# Altium PCB 总线驱动板-V1.0.PcbDoc
Units mil, origin at the board's own origin, x right, y up, seen from the top; angles counter-clockwise.
Board outline 1968.5 x 1181.1 mil, 2 copper layers (Top Layer, Bottom Layer); 27 components, 22 nets, 133 pads, 42 vias.
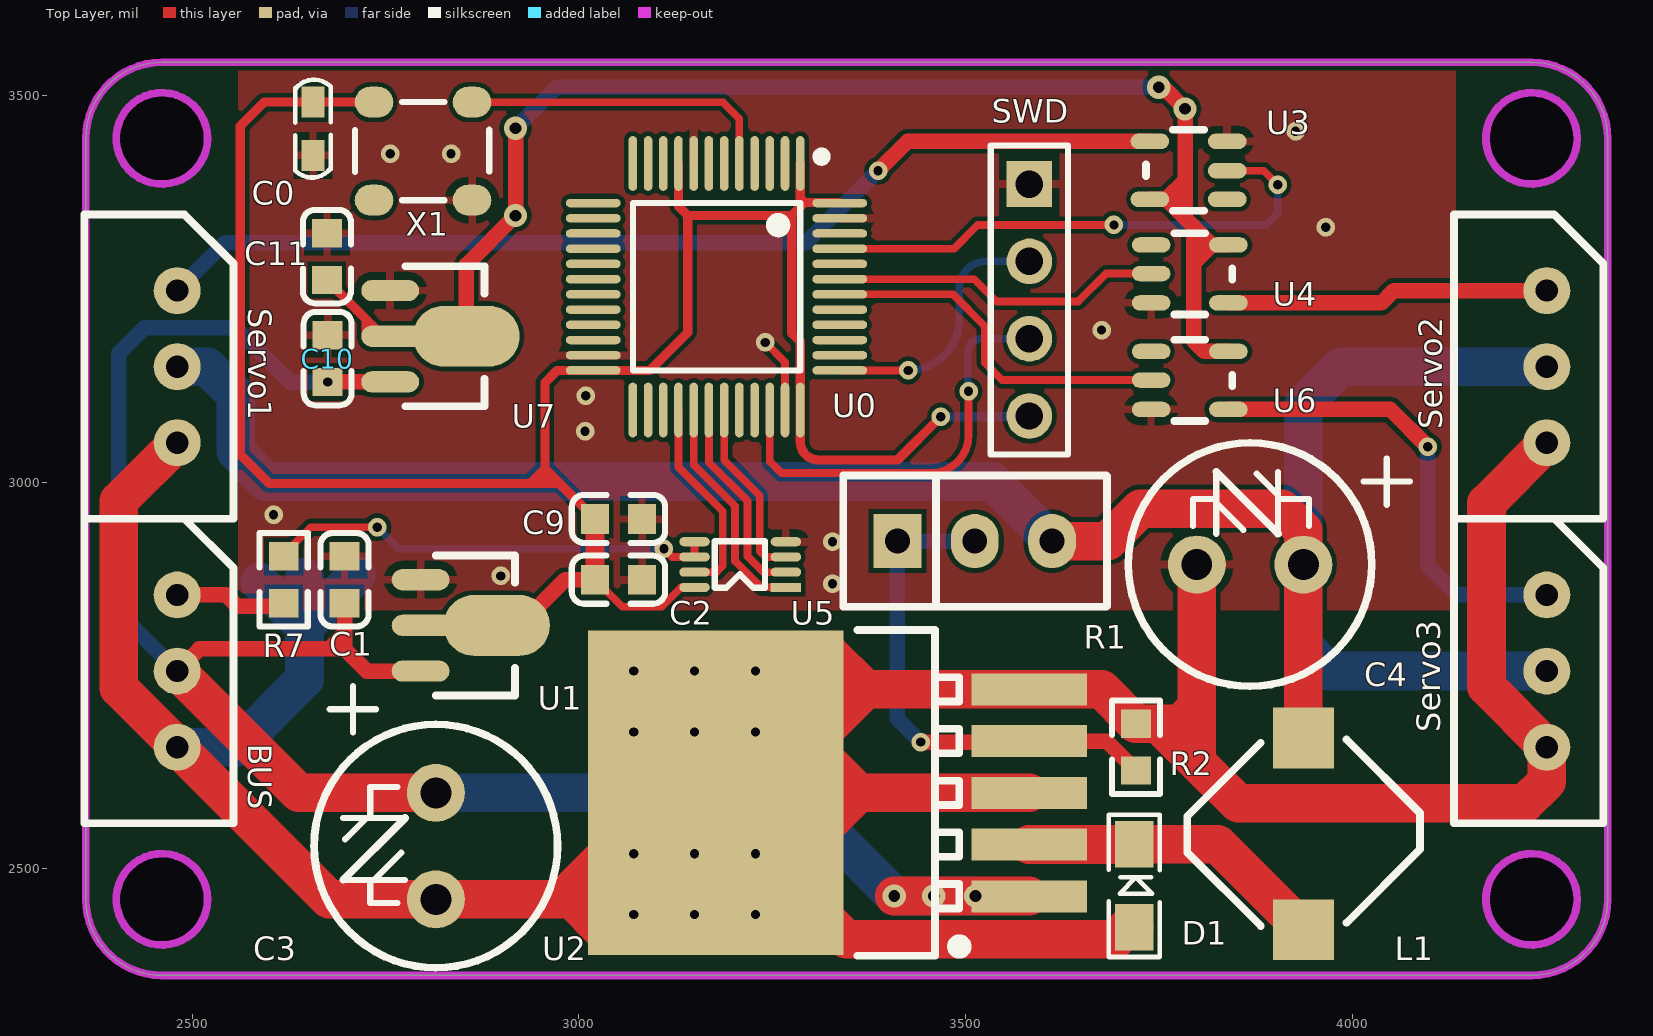
[diagram p0: Top Layer view]
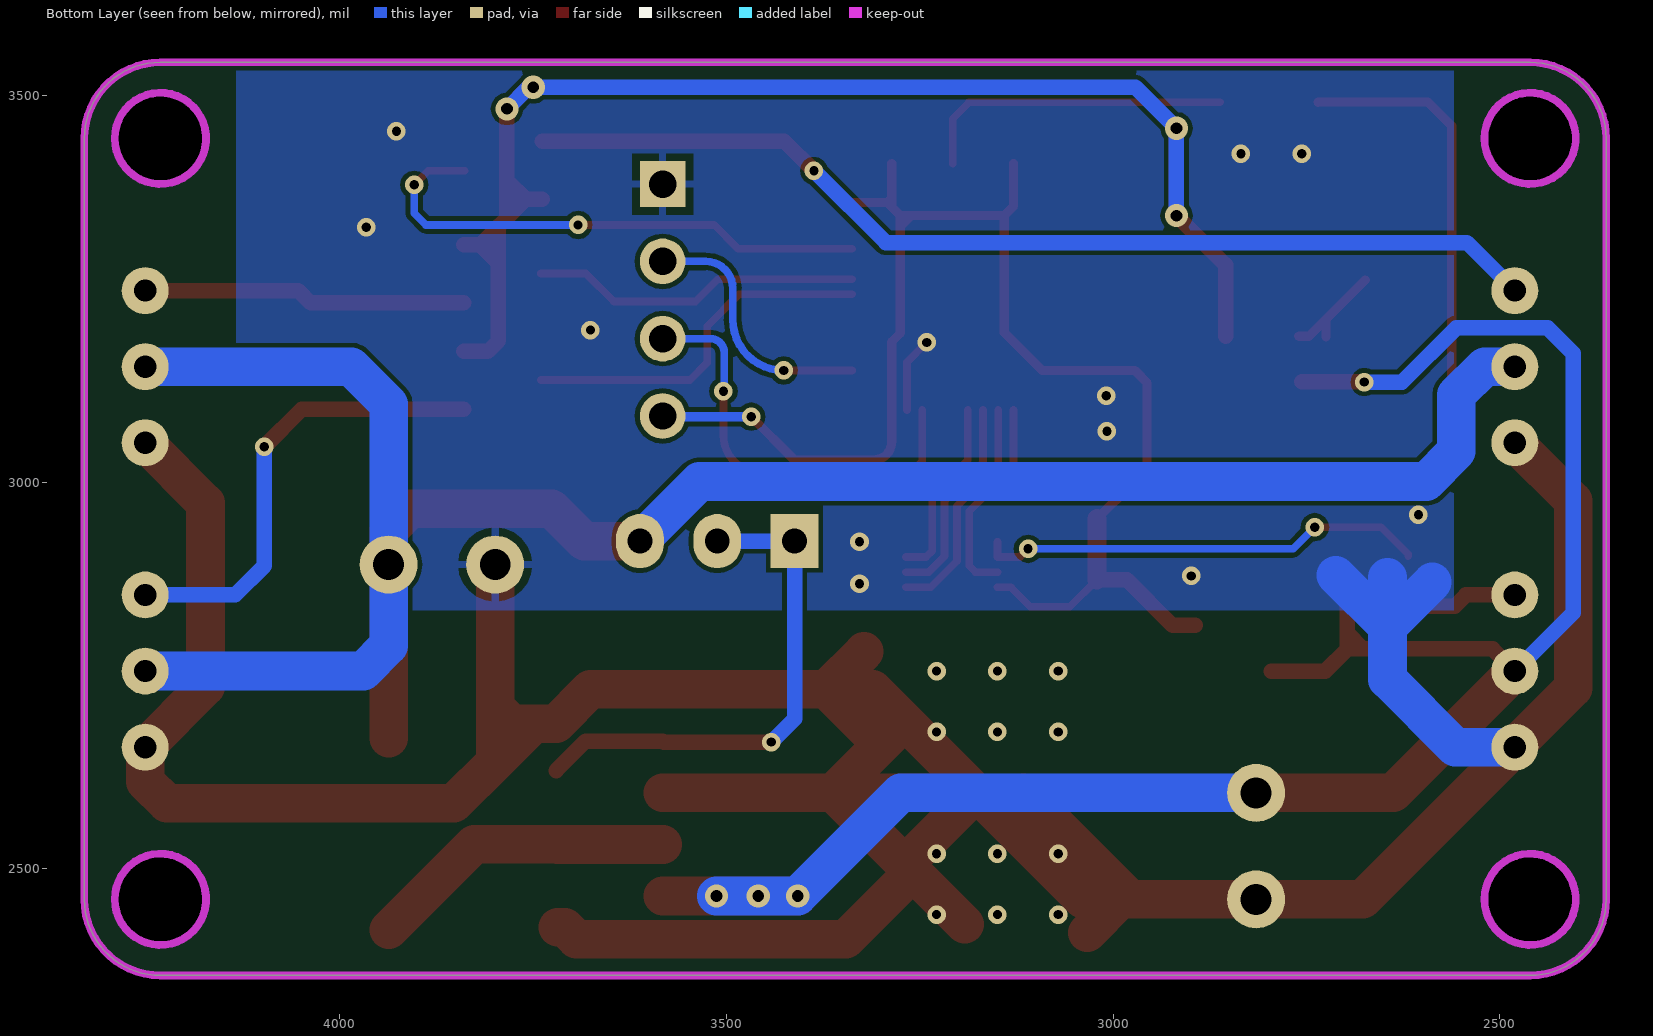
[diagram p1: Bottom Layer view, seen from below]
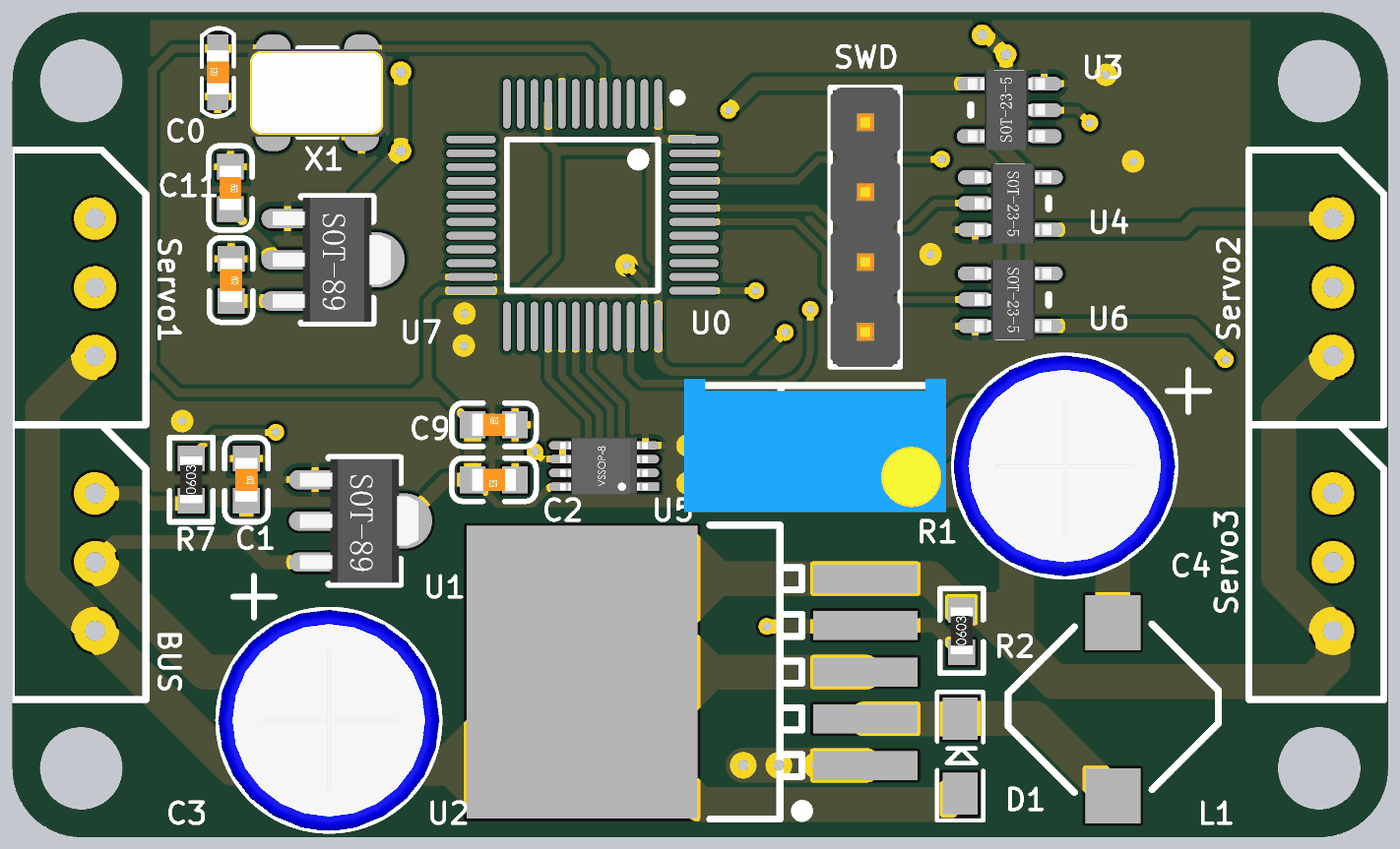
[diagram p2: 3D render of the assembled board from above, using the file's embedded part models]

## Layer stack, top to bottom
Top Solder: solder mask 0.4, Solder Resist, Dk 3.5
Top Layer: signal copper 1.4
Dielectric 1: dielectric 12.6, FR-4, Dk 4.8
Bottom Layer: signal copper 1.4
Bottom Solder: solder mask 0.4, Solder Resist, Dk 3.5

## Board outline
2362.2,2460.63 2362.2,3444.88 cw(c2460.63,3444.88) 2460.63,3543.31 4232.28,3543.31 cw(c4232.28,3444.88) 4330.71,3444.88 4330.71,2460.63 cw(c4232.28,2460.63) 4232.28,2362.2 2460.63,2362.2 cw(c2460.63,2460.63)
cut-out: 4232.28,3385.83 cw(c4232.28,3444.88) 4173.23,3444.88 cw(c4232.28,3444.88) 4232.28,3503.94 cw(c4232.28,3444.88) 4291.34,3444.88 cw(c4232.28,3444.88)
cut-out: 4232.28,2401.57 cw(c4232.28,2460.63) 4173.23,2460.63 cw(c4232.28,2460.63) 4232.28,2519.68 cw(c4232.28,2460.63) 4291.34,2460.63 cw(c4232.28,2460.63)
cut-out: 2460.63,2401.57 cw(c2460.63,2460.63) 2401.57,2460.63 cw(c2460.63,2460.63) 2460.63,2519.68 cw(c2460.63,2460.63) 2519.68,2460.63 cw(c2460.63,2460.63)
cut-out: 2460.63,3385.83 cw(c2460.63,3444.88) 2401.57,3444.88 cw(c2460.63,3444.88) 2460.63,3503.94 cw(c2460.63,3444.88) 2519.68,3444.88 cw(c2460.63,3444.88)

## Design rules (kind name [scope] priority, off if disabled: settings)
Clearance [All] p1: gap=6
HoleToHoleClearance [All] p1: gap=6 allowstackedmicrovias=TRUE
MinimumSolderMaskSliver [All] p1: minsoldermaskwidth=6
PolygonConnect PolygonConnect_1 [isvia] p1: connectstyle=Direct reliefconductorwidth=10 reliefentries=4 polygonreliefangle="90 Angle" airgapwidth=10
PolygonConnect [All] p2: connectstyle=Relief reliefconductorwidth=10 reliefentries=4 polygonreliefangle="90 Angle" airgapwidth=10
RoutingVias [All] p1: holewidth=28 width=50 viastyle="Through Hole" minholewidth=28 minwidth=50 maxholewidth=28 maxwidth=50
SilkToSilkClearance [All] p1: silktosilkclearance=0
SilkToSolderMaskClearance [IsPad] p1: minsilkscreentomaskgap=0 clearancetoexposedcopper=TRUE
SolderMaskExpansion [All] p1: expansion=4
Width [All] p1: maxlimit=100 minlimit=10 preferedwidth=50 minimp=50.000000 maximp=50.000000 favimp=50.000000
25 further rules are at their usual default settings.

## Components (designator, comment, footprint, x,y, rotation, side; value= is the part's Value field where it differs from the comment)
BUS "Header 3" 3P 2480.32,2854.33 r270 top
C0 "C0603" C0603 2656,3423 r90 top
C1 "C0603" Cap_0603 2696.85,2874.02 r270 top
C2 "C0603" Cap_0603 3051.18,2874.02 r180 top
C3 "CAP_B" Cap_electrolitic_φ3.5_8 2814.96,2460.63 r90 top
C4 "CAP_B" Cap_electrolitic_φ3.5_8 3799.21,2893.7 r0 top
C9 "C0603" Cap_0603 3051.18,2952.76 r0 top
C10 "C0603" Cap_0603 2675,3160 r270 top
C11 "C0603" Cap_0603 2674,3292 r270 top
D1 "IN5822" 0805D 3720.47,2480.32 r270 top
L1 "INDUCTOR" INDUCTOR 3937.01,2421.26 r90 top
R1 "RPot" SIP-3 3412,2924 r0 top
R2 "R0603" Res_0603 3720.47,2657.48 r90 top
R7 "R0603" Res_0603 2618.11,2874.02 r90 top
Servo1 "Header 3" 3P 2480.32,3248.03 r270 top
Servo2 "Header 3" 3P 4251.97,3248.03 r270 top
Servo3 "Header 3" 3P 4251.97,2854.33 r270 top
SWD "Header 4" HDR1X4_ 3582.68,3385.83 r270 top
U0 "STM32F103C8T6" LC-LQFP-48_7x7x05P 3178,3253 r180 top
U1 "AMS1117" LC-SOT-89(SOT-89-3) 2795.28,2814.96 r180 top
U2 "LM2596" LC-TO-263-5 3582.68,2598.43 r0 top
U3 "74V1G14" SOT-23-5 3838.58,3366.14 r90 top
U4 "74V1G14" SOT-23-5 3740.16,3307.09 r270 top
U5 "SN74LVC2G126" VSSOP-8 3208.66,2893.7 r180 top
U6 "74V1G14" SOT-23-5 3740.16,3169.29 r270 top
U7 "AMS1117" LC-SOT-89(SOT-89-3) 2755.91,3188.98 r180 top
X1 "32MHz" crystal 2735,3365 r90 top (schematic designator ceystal)

## Footprints (in the part's own frame and the unit in brackets; to place one, negate y for a bottom-side part, rotate by r counter-clockwise, add the part's x,y. Pads: shape width x height; smd on the part's side, far side on the other; paste and mask are expansions set on the pad)
3P [mm]
  round 1.542 hole 0.73: 1(0,0) 2(2.5,0) 3(5,0)
  silkscreen extent -2.5,-3.05 7.5,1.85, body extent -2.51,-3.1 7.49,1.8, height 6
0805D [mil]
  rect 60x50 smd: A(56,-2) K(-51.5,-2)
  silkscreen extent -90,-35 94,31
C0603 [mil]
  rect 40x30 smd: 1(0,0) 2(68.9,0)
  silkscreen extent -29,-23 98,23, body extent 3,-16 66,16, height 12
Cap_0603 [mm]
  rect 0.93x0.98 smd: 1(-0.77,0) 2(0.77,0)
  silkscreen extent -1.53,-0.79 1.54,0.79, body extent -0.8,-0.4 0.8,0.4, height 0.3
Cap_electrolitic_φ3.5_8 [mil]
  round 75 hole 40: 1(137.8,0) 2(0,0)
  silkscreen extent -89,-157 276,157, body extent -90,-158 227,158, height 464
crystal [mil]
  round 20 on Top Overlay: 0(37,-28)
  oval 40x50 smd: 1(0,0) 2(0,-126.77) 3(126.77,-126.77) 4(126.77,0)
  silkscreen extent 0,-149 127,25, body extent 0,-161 126,36, height 39
HDR1X4_ [mm]
  rect 1.5x1.5 hole 0.9: 1(0,0)
  round 1.5 hole 0.9: 2(2.54,0) 3(5.08,0) 4(7.62,0)
  silkscreen extent -1.27,-1.27 8.89,1.27, body extent -1.27,-1.27 8.89,1.27, height 10.1
INDUCTOR [mm]
  rect 2x2 smd: 1(0,0) 2(6.299,0)
  silkscreen extent 0.13,-3.84 6.25,3.81
LC-LQFP-48_7x7x05P [mm]
  oval 0.28x1.8 smd mask+0.051: 1(-2.75,-4.05) 2(-2.25,-4.05) 3(-1.75,-4.05) 4(-1.25,-4.05) 5(-0.75,-4.05) 6(-0.25,-4.05) 7(0.25,-4.05) 8(0.75,-4.05) 9(1.25,-4.05) 10(1.75,-4.05) 11(2.25,-4.05) 12(2.75,-4.05) 25(2.75,4.05) 26(2.25,4.05) 27(1.75,4.05) 28(1.25,4.05) 29(0.75,4.05) 30(0.25,4.05) 31(-0.25,4.05) 32(-0.75,4.05) 33(-1.25,4.05) 34(-1.75,4.05) 35(-2.25,4.05) 36(-2.75,4.05)
  oval 1.8x0.28 smd mask+0.051: 13(4.05,-2.75) 14(4.05,-2.25) 15(4.05,-1.75) 16(4.05,-1.25) 17(4.05,-0.75) 18(4.05,-0.25) 19(4.05,0.25) 20(4.05,0.75) 21(4.05,1.25) 22(4.05,1.75) 23(4.05,2.25) 24(4.05,2.75) 37(-4.05,2.75) 38(-4.05,2.25) 39(-4.05,1.75) 40(-4.05,1.25) 41(-4.05,0.75) 42(-4.05,0.25) 43(-4.05,-0.25) 44(-4.05,-0.75) 45(-4.05,-1.25) 46(-4.05,-1.75) 47(-4.05,-2.25) 48(-4.05,-2.75)
  silkscreen extent -3.6,-4.42 2.75,2.75
LC-SOT-89(SOT-89-3) [mm]
  oval 1.9x0.7 smd: 1(0,-1.5) 3(0,1.5)
  oval 3.5x2 smd: 2(-2.5,0)
  oval 2.1x0.7 smd: 2(-0.1,0)
  silkscreen extent -3.1,-2.3 -0.5,2.3, body extent -3.75,-2.25 0.55,2.25, height 1.51
LC-TO-263-5 [mm]
  rect 8.4x10.65 smd: 0(-10.3,0)
  rect 3.8x1.05 smd: 1(0,-3.4) 2(0,-1.7) 3(0,0) 4(0,1.7) 5(0,3.4)
  silkscreen extent -5.65,-5.35 -2.1,5.35
Res_0603 [mm]
  rect 0.93x0.98 smd: 1(-0.77,0) 2(0.77,0)
  silkscreen extent -1.53,-0.79 1.54,0.79, body extent -0.85,-0.4 0.85,0.4, height 0.56
SIP-3 [mil]
  rect 62x70 hole 32: 1(0,0)
  oval 62x70 hole 32: 2(100,0) 3(200,0)
  silkscreen extent -70,-85 271,85, body extent -89,-96 287,94, height 455
SOT-23-5 [mil]
  oval 20x50 smd: 1(0,0) 2(37,0) 3(75,0) 4(75,100) 5(0,100)
  silkscreen extent -15,30 90,105, body extent -20,-1 95,109, height 47
VSSOP-8 [mm]
  rect 1x0.3 smd: 1(-1.5,0.75)
  oval 1x0.3 smd: 2(-1.5,0.25) 3(-1.5,-0.25) 4(-1.5,-0.75) 5(1.5,-0.75) 6(1.5,-0.25) 7(1.5,0.25) 8(1.5,0.75)
  silkscreen extent -0.81,-0.76 0.84,0.76, body extent -1.6,-1.04 1.6,1.06, height 0.9

## Part data
BUS Servo1 Servo2 Servo3: "Header, 3-Pin"
C0: library part Cap(0603), "Capacitor (Semiconductor SIM Model)"
C1 C2 C10 C11: library part Cap0603
C3 C4: "Polarized Capacitor (Radial)"
C9: library part "Cap 1"
D1: library part Diode
R1: "Potentiometer"
R2: library part RES, "Resistor"
R7: library part Res2
SWD: "Header, 4-Pin"
U0: "STM32 ARM-based 32-bit MCU with 64 Kbytes Flash, 48-pin LQFP, Industrial Temperature"
X1: library part "CRYSTAL OSCILLATOR"

## Via types
v1: diameter 24, hole 12, Top Layer to Bottom Layer, 35 vias
v2: diameter 30, hole 15, Top Layer to Bottom Layer, 7 vias

## Nets (pads, with @x,y where several pads share a name; then routed paths per layer and width w, separated by ;. In a path a pad name is that pad's centre, name@x,y a point inside that pad or via, vN(x,y) a via of type N, cw(c..) or ccw(c..) an arc to the next point about the centre after c; other vN are vias at no path point)
3.3V: C0.2 C2.2 C9.1 SWD.4 U0.1 U0.9 U0.24 U0.36 U0.48 U1.2 U5.8 X1.4 | length 3025.4
  Top Layer w10: C2.2 3055.88,2839 3107,2839 3132.17,2864.17 U5.8
  Top Layer w12: X1.4 2734.87,3491.9 C0.2 2592.9,3491.9 2562,3461 2562,3036 2599.38,2998.62 2937,2998.62 ; C9.1 2975,2998.62 ; U0.9 3128.79,3357.21 3140.73,3345.27 ; U0.1 3286.27,3367.73 ; U0.48 3336.72,3362 3292,3362 ; v1(3468,3085) 3412,3029 3310,3029 cw(c3310,3052.73) 3286.27,3052.73 U0.36 3286.27,3181.73 3275.27,3192.73 3275.27,3331 ; 2937,2998.62 2956,2998.62 ; 2937,2998.62 2956,3017.62 ; 2956,2998.62 2975,2998.62 ; 2956,2998.62 2956,3017.62 ; 2956,3017.62 2975,2998.62 ; 2956,3017.62 2956,3129 2971.73,3144.73 U0.24 3091.73,3144.73 3140.73,3193.73 3140.73,3345.27 ; 3140.73,3345.27 3261,3345.27 ; 3261,3345.27 3275.27,3345.27 ; 3261,3345.27 3275.27,3331 ; 3275.27,3331 3275.27,3345.27 ; 3275.27,3345.27 3286.27,3356.27 ; 3286.27,3356.27 3292,3362 ; 3286.27,3356.27 3286.27,3367.73 ; 3286.27,3367.73 3292,3362
  Top Layer w20: U1.2@2893.7,2814.96 2922.96,2814.96 2982.02,2874.02 C2.2
  Top Layer w25: C2.2 C9.1
  Bottom Layer w12: v1(3468,3085) SWD.4@3581.85,3085
5.0V: C11.2 U3.5 U4.5 U6.5 U7.2 | length 2075.2
  Top Layer w12: C11.2 2724.68,3211 ; U7.2@2724.68,3188 2724.68,3211 ; U7.2@2759.84,3188.98 2746.71,3188.98 2724.68,3211
  Top Layer w20: U7.2@2854.33,3188.98 2854.33,3281.33 v2(2918,3345) v2(2918,3458) ; U3.5 U3.5@3759.64,3366.14 ; v2(3750,3511) 3756,3511 v2(3784,3483) 3784.5,3482.5 3784.5,3391 ; 3784.36,3366.14 U3.5@3759.86,3366.14 ; 3795.91,3307.09 U4.5@3818.91,3307.09 ; U6.5 3808.71,3169.29 3795,3183 3795,3284 ; U4.5 U4.5@3818.91,3307.09 ; U3.5@3759.64,3366.14 U3.5@3759.86,3366.14 ; U3.5@3759.64,3366.14 3784.5,3391 ; U3.5@3759.86,3366.14 3784.5,3341.5 ; 3784.5,3341.5 3784.5,3391 ; 3784.5,3341.5 3795,3331 ; 3795,3284 3795,3331 ; 3795,3284 3795.83,3284 U4.5@3818.91,3307.09 ; 3795,3331 U4.5@3818.91,3307.09
  Bottom Layer w20: v2(2918,3345) v2(2918,3458) 2971,3511 v2(3750,3511) 3756,3511 v2(3784,3483)
A: U0.45 U3.2 | length 695.4
  Top Layer w10: U0.45 3485.21,3302.21 3516,3333 v1(3692,3333) ; U3.2 3885.86,3403.14 v1(3904,3385)
  Bottom Layer w10: v1(3692,3333) 3889,3333 3904,3348 v1(3904,3385)
B: U0.43 U4.2 | length 429.6
  Top Layer w10: U0.43 3511.16,3262.84 3540,3234 3646,3234 3682.09,3270.09 U4.2
BUS: BUS.1 R7.1 | length 140
  Top Layer w20: BUS.1 2543.67,2854.33 2558,2840 R7.1@2614.41,2840
C: U0.42 U6.2 | length 476.2
  Top Layer w10: U0.42 3483.84,3243.16 3525,3202 3525,3155 3547.71,3132.29 U6.2
EXTAL: U0.5 X1.3 | length 412.6
  Top Layer w10: X1.3 3186.23,3491.77 3207.53,3470.47 U0.5
GND: BUS.3 C0.1 C1.1 C2.1 C3.2 C4.2 C9.2 C10.1 C11.1 D1.A R2.2 Servo1.3 Servo2.3 Servo3.3 SWD.1 U0.8 U0.23 U0.35 U0.47 U1.1 U2.0 U2.3 U2.5 U3.3 U4.3 U5.4 U6.3 U7.1 X1.2 | length 5719.2
  Top Layer w10: v1(3241,3181) 3266.58,3155.42 U0.35
  Top Layer w50: Servo1.3 2405,2975.87 2405,2734 2480.32,2658.68 BUS.3 2677.17,2460.63 C3.2 2978,2460.63 ; U2.0@3033.6,2417.6 2990.57,2460.63 ; U2.0@3115.8,2598.43 2978,2460.63 ; U2.0@3192,2428.43 3362,2598.43 ; U2.0@3287.37,2673.06 3362,2598.43 ; U2.0@3310.43,2671.71 3371,2732.28 ; U2.0@3322.14,2781.14 3371,2732.28 ; U2.3 3362,2598.43 ; D1.A 3709.32,2424.32 3694,2409 3346,2409 3269.58,2485.42 3269.58,2506.01 U2.0 ; C4.2 3799.21,2709.21 ; Servo2.3 4174,2973.21 4174,2735.45 Servo3.3 4251.97,2612.97 4223.73,2584.73 3852.73,2584.73 3799.21,2638.25 ; 2978,2460.63 2990.57,2460.63 ; 2990.57,2460.63 3039.37,2460.63 U2.0 ; U2.0 3362,2598.43 ; U2.0 3311.02,2732.28 3371,2732.28 ; 3371,2732.28 U2.5 3675.98,2732.28 R2.2 3749.67,2687.8 ; 3749.67,2687.8 3777.8,2687.8 3799.21,2709.21 ; 3749.67,2687.8 3799.21,2638.25 ; 3799.21,2638.25 3799.21,2709.21
  Bottom Layer w50: BUS.3 2557.48,2657.48 2645,2745 2645,2813 ; 2587,2871 2645,2813 ; 2645,2877 2645,2813 ; 2712,2880 2645,2813
  other v1: 3070.87,2440.94 3149.61,2440.94 3228.35,2440.94 3070.87,2519.68 3149.61,2519.68 3228.35,2519.68 3070.87,2677.17 3149.61,2677.17 3228.35,2677.17 3070.87,2755.91 3149.61,2755.91 3228.35,2755.91 3328,2869 2899,2879 3328,2923 2605,2958 3008,3066 3009,3112 3676,3197 3966,3330 2755.91,3425.2 2834.65,3425.2 3927,3454
NetD1_K: D1.K L1.1 U2.2 | length 399.8
  Top Layer w50: U2.2 D1.K@3718.15,2531.5 ; D1.K 3826.45,2531.82 L1.1
NetR1_2: R1.1 R1.2 R2.1 U2.4 | length 665.4
  Top Layer w20: v1(3442,2664) U2.4@3581.32,2664 ; U2.4 3682.28,2665.35 R2.1
  Bottom Layer w20: v1(3442,2664) 3412,2694 R1.1 R1.2
NetR7_2: R7.2 U5.5 U5.6 | length 584.3
  Top Layer w10: R7.2 2618.11,2907.11 2653,2942 v1(2739,2942) ; v1(3110,2914) 3120.46,2903.54 U5.6 U5.5
  Bottom Layer w10: v1(2739,2942) 2767,2914 v1(3110,2914)
OUT1: C4.1 L1.2 R1.3 Servo1.2 Servo2.2 Servo3.2 | length 2866.4
  Top Layer w50: R1.3 3684,2924 3726,2966 3909,2966 3937.01,2937.99 C4.1 L1.2
  Bottom Layer w50: Servo1.2 2519.39,3149.61 2556,3113 2556,3040 2595,3001 3535,3001 R1.3 ; Servo3.2 3970.09,2755.91 3937.01,2788.99 C4.1 3937.01,3101.01 3985.61,3149.61 Servo2.2
PWM1: Servo1.1 U3.4 | length 1338.3
  Top Layer w20: v1(3387,3403) 3425.14,3441.14 U3.4
  Bottom Layer w20: Servo1.1 2542.28,3310 3294,3310 v1(3387,3403)
PWM2: Servo2.1 U4.4 | length 418.4
  Top Layer w20: U4.4 4038.09,3232.09 4054.03,3248.03 Servo2.1
PWM3: Servo3.1 U6.4 | length 601.4
  Top Layer w20: U6.4 4049.71,3094.29 v1(4098,3046)
  Bottom Layer w20: v1(4098,3046) 4098,2892 4135.67,2854.33 Servo3.1
RX: U0.31 U5.3 | length 238.3
  Top Layer w10: U0.31 3187.84,3028.78 3234,2982.63 3234,2911.25 3241.71,2903.54 U5.3
RX-OE: U0.28 U5.7 | length 265
  Top Layer w10: U0.28 3128.79,3019.59 3186,2962.37 3186,2892 3177.86,2883.86 U5.7
SWCLK: SWD.2 U0.37 | length 343.2
  Top Layer w10: U0.37 v1(3426,3144.73) ; SWD.2 SWD.2@3582.68,3286
  Bottom Layer w10: v1(3426,3144.73) ccw(c3426,3210.73) 3492,3210.73 3492,3251 cw(c3526.83,3251) 3526.83,3285.83 SWD.2
SWDIO: SWD.3 U0.34 | length 557
  Top Layer w10: U0.34 3246.9,3027.1 3262,3012 3455,3012 ccw(c3455,3061) 3504,3061 v1(3504,3118) ; SWD.3@3581.5,3187 cw(c3581.5,3185.83) SWD.3
  Bottom Layer w10: v1(3504,3118) cw(c3504,3119) 3503,3119 3503,3168 cw(c3520.83,3168) 3520.83,3185.83 SWD.3
TX: U0.30 U5.2 | length 267.9
  Top Layer w10: U0.30 3168.16,3025.84 3218,2976 3218,2904.63 3238.77,2883.86 U5.2
TX-OE: U0.29 U5.1 | length 297.5
  Top Layer w10: U0.29 3148.47,3022.53 3202,2969 3202,2898 3235.83,2864.17 U5.1
VCC: BUS.2 C1.2 C3.1 C10.2 U1.3 U2.1 U7.3 | length 2589.8
  Top Layer w20: BUS.2 2509.06,2784.65 2676.5,2784.65 ; C10.2@2675.24,3129.92 U7.3 ; C1.2 2696.85,2805 ; U1.3 2725.59,2755.91 2696.85,2784.65 ; 2676.5,2784.65 2696.85,2784.65 ; 2676.5,2784.65 2696.85,2805 ; 2696.85,2784.65 2696.85,2805
  Top Layer w50: BUS.2 2637.8,2598.43 C3.1 ; v2(3408,2465) v2(3459,2465) v2(3513,2465) U2.1@3582.24,2465
  Bottom Layer w20: BUS.2 2405,2831.22 2405,3167 2438,3200 2556,3200 2626.32,3129.68 v1(2675,3129.68)
  Bottom Layer w50: C3.1 3274.57,2598.43 v2(3408,2465) v2(3459,2465) v2(3513,2465)
pads on no net: U0.2 U0.3 U0.4 U0.6 U0.7 U0.10 U0.11 U0.12 U0.13 U0.14 U0.15 U0.16 U0.17 U0.18 U0.19 U0.20 U0.21 U0.22 U0.25 U0.26 U0.27 U0.32 U0.33 U0.38 U0.39 U0.40 U0.41 U0.44 U0.46 U3.1 U4.1 U6.1 X1.0 X1.1

## Polygon pours and split planes (outlines as drawn)
GND on Top Layer "BOT-GND" (solid, remove dead copper, pour order 2): 2559.06,3543.31 2559.06,2834.65 4133.86,2834.65 4133.86,3543.31
GND on Bottom Layer "BOT-GND" (solid, remove dead copper, pour order 4): 2559.06,3543.31 2559.06,2834.65 4133.86,2834.65 4133.86,3543.31

## Keep-outs
Keep-Out Layer:
  circle w10: c4232.28,3444.88 r59.06
  circle w10: c4232.28,2460.63 r59.06
  circle w10: c2460.63,2460.63 r59.06
  circle w10: c2460.63,3444.88 r59.06
  lines w10: 2362.2,2460.63 ccw(c2460.63,2460.63) 2460.63,2362.2 4232.28,2362.2 ccw(c4232.28,2460.63) 4330.71,2460.63 4330.71,3444.88 ccw(c4232.28,3444.88) 4232.28,3543.31 2460.63,3543.31 ccw(c2460.63,3444.88) 2362.2,3444.88 2362.2,2460.63